# Allegro board CCS.brd
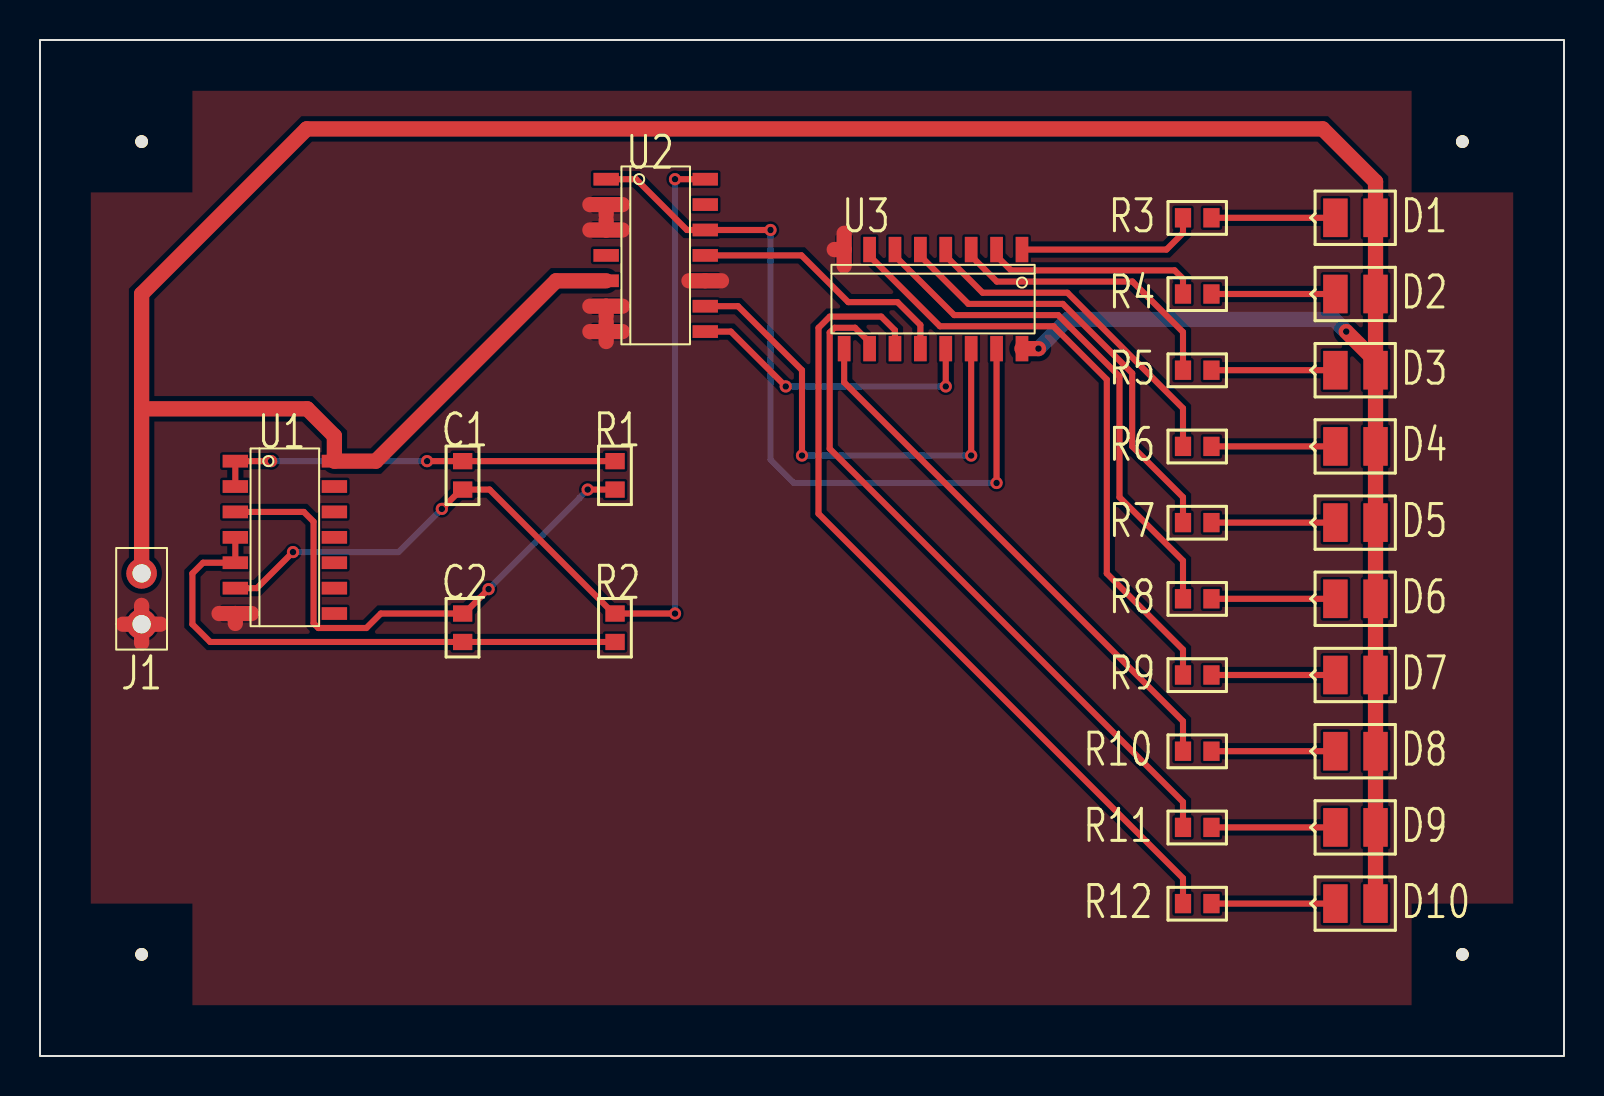
[diagram p0: board, top side]
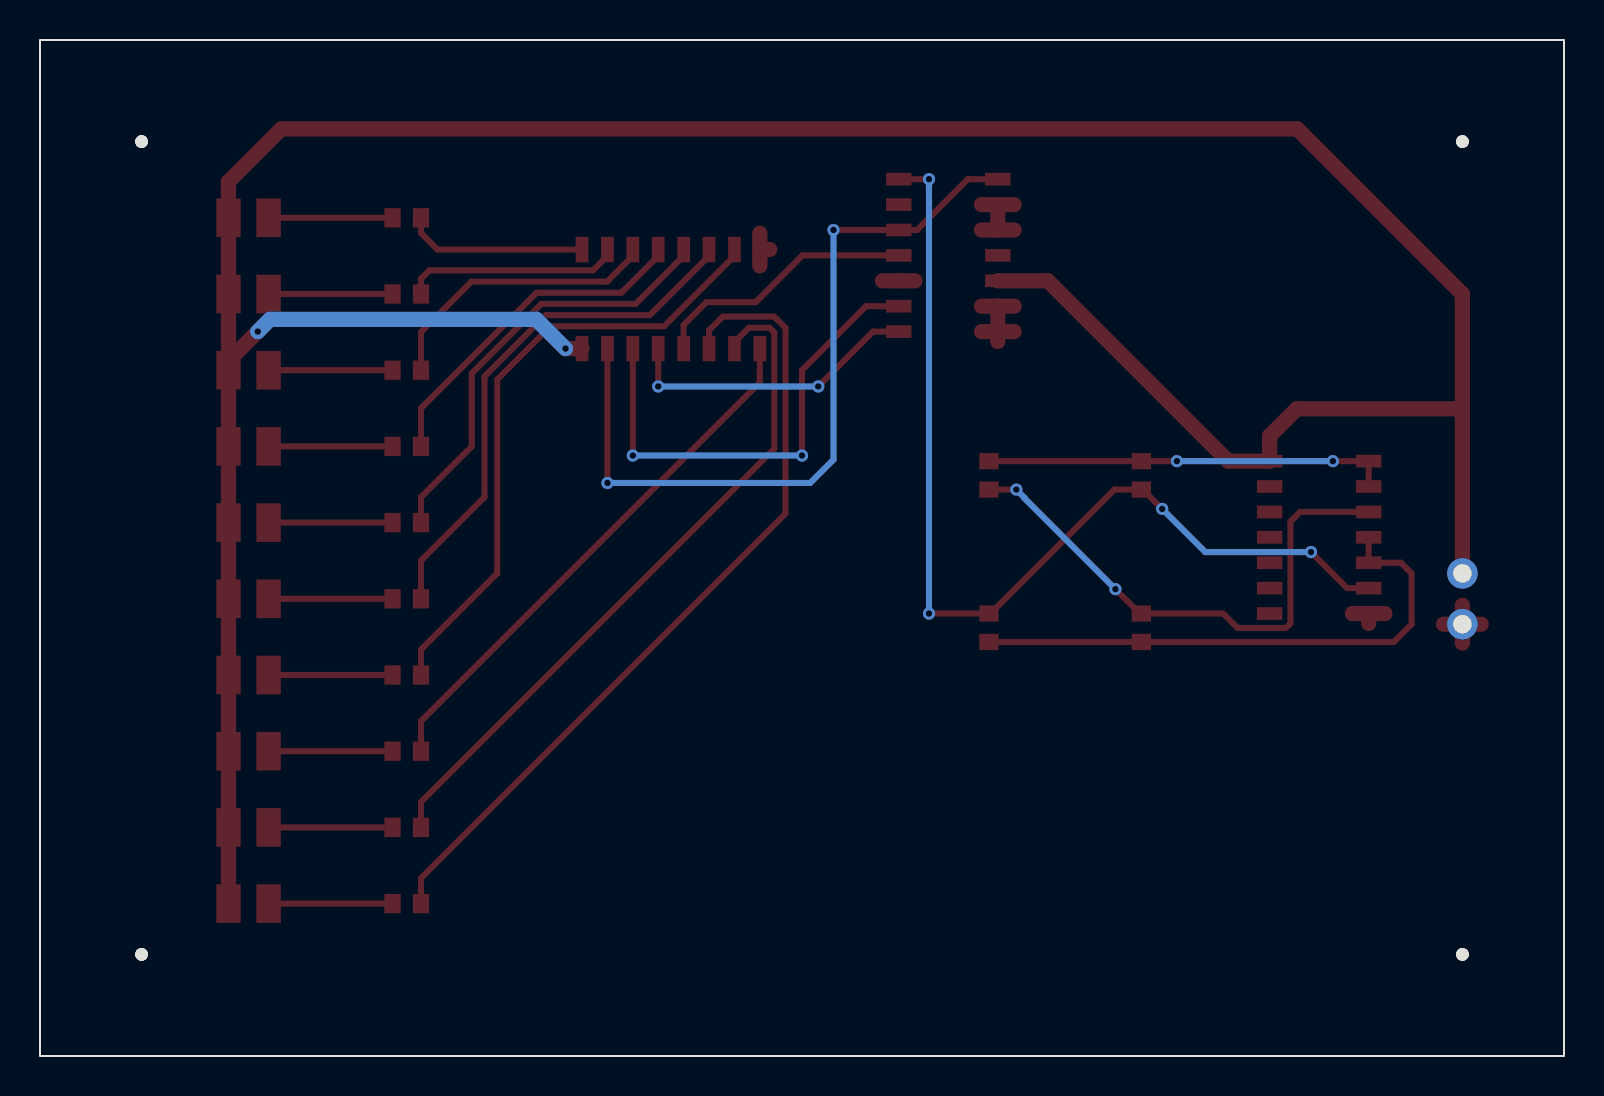
[diagram p1: board, bottom side, seen from below]

Outline 76.2 x 50.8 mm; copper layers: TOP, BOTTOM. Coordinates in mm from the lower left corner of the outline.
Outline path: rectangle 0,0 76.2,50.8

## Design rules (mm)
constraint set DEFAULT: min track width 0.305
nets with their own width: min track width 0.762; nets GND VCC

## Placement (name value [footprint] x y rotation side)
C1  47u  [SMC0603]  21.13 29.74 270 top
C2  47u  [SMC0603]  21.13 22.12 270 top
D1  LED  [SMD080512]  64.77 41.91 0 top
D2  LED  [SMD080512]  64.77 38.1 0 top
D3  LED  [SMD080512]  64.77 34.29 0 top
D4  LED  [SMD080512]  64.77 30.48 0 top
D5  LED  [SMD080512]  64.77 26.67 0 top
D6  LED  [SMD080512]  64.77 22.86 0 top
D7  LED  [SMD080512]  64.77 19.05 0 top
D8  LED  [SMD080512]  64.77 15.24 0 top
D9  LED  [SMD080512]  64.77 11.43 0 top
D10  LED  [SMD080512]  64.77 7.62 0 top
J1  CON2  [JUMPER2]  5.08 24.13 270 top
NOREF  -  [unnamed]  71.12 45.72 0 top
NOREF#2  -  [unnamed]  5.08 5.08 0 top
NOREF#3  -  [unnamed]  5.08 45.72 0 top
NOREF#4  -  [#2]  0 50.8 0 top
NOREF#5  -  [#2]  76.2 0 90 top
NOREF#6  -  [unnamed]  71.12 5.08 0 top
R1  1k  [SMR0603]  28.75 29.74 270 top
R2  1k  [SMR0603]  28.75 22.12 270 top
R3  100  [SMR0603]  57.15 41.91 0 top
R4  100  [SMR0603]  57.15 38.1 0 top
R5  100  [SMR0603]  57.15 34.29 0 top
R6  100  [SMR0603]  57.15 30.48 0 top
R7  100  [SMR0603]  57.15 26.67 0 top
R8  100  [SMR0603]  57.15 22.86 0 top
R9  100  [SMR0603]  57.15 19.05 0 top
R10  100  [SMR0603]  57.15 15.24 0 top
R11  100  [SMR0603]  57.15 11.43 0 top
R12  100  [SMR0603]  57.15 7.62 0 top
U1  7400  [SOIC14]  12.24 25.93 0 top
U2  7490  [SOIC14]  30.78 40.03 0 top
U3  7442  [SOIC16]  44.65 37.85 270 top

## Library data of the parts
C1 C2 = CAP NP
D1-D10 = LED
J1 = CON2: User Part Number: ***
R1-R12 = R
U1 = 7400: Tolerance: ***; User Part Number: ***
U2 = 7490: Tolerance: ***; User Part Number: ***
U3 = 7442: Tolerance: ***; User Part Number: ***

## Footprints (pads in the part's own frame, mm; a bottom-side part is the same pattern mirrored in y, then rotated)
JUMPER2
  round 1.524 hole 0.914: 1(0,0) 2(2.54,0)
SMC0603
  rect 0.813x0.965 smd: 1(0,0) 2(1.422,0)
SMD080512
  rect 1.219x1.93 smd: 1(0,0) 2(2.007,0)
SMR0603
  rect 0.813x0.965 smd: 1(0,0) 2(1.422,0)
SOIC14
  rect 1.27x0.635 smd: 1(-2.477,3.81) 2(-2.477,2.54) 3(-2.477,1.27) 4(-2.477,0) 5(-2.477,-1.27) 6(-2.477,-2.54) 7(-2.477,-3.81) 8(2.477,-3.81) 9(2.477,-2.54) 10(2.477,-1.27) 11(2.477,0) 12(2.477,1.27) 13(2.477,2.54) 14(2.477,3.81)
SOIC16
  rect 1.27x0.635 smd: 1(-2.477,4.445) 2(-2.477,3.175) 3(-2.477,1.905) 4(-2.477,0.635) 5(-2.477,-0.635) 6(-2.477,-1.905) 7(-2.477,-3.175) 8(-2.477,-4.445) 9(2.477,-4.445) 10(2.477,-3.175) 11(2.477,-1.905) 12(2.477,-0.635) 13(2.477,0.635) 14(2.477,1.905) 15(2.477,3.175) 16(2.477,4.445)
unnamed
  round 0.635 hole 3.175 unplated: (0,0)

## Nets
GND: J1.2 U1.7 U2.2 U2.3 U2.6 U2.7(R92) U2.10 U3.8
VCC: D1.2 D2.2 D3.2 D4.2 D5.2 D6.2 D7.2 D8.2 D9.2 D10.2 J1.1 U1.14 U2.5 U3.16
CLK: C1.2 R2.1 U1.6 U2.14
N00847: R3.1 U3.1
N00853: R4.1 U3.2
N00859: R5.1 U3.3
N00865: R6.1 U3.4
N00871: R7.1 U3.5
N00877: R8.1 U3.6
N00883: R9.1 U3.7
N00889: R10.1 U3.9
N00895: R11.1 U3.10
N00901: R12.1 U3.11(Y\9\)
N00905: D1.1(CATHODE) R3.2
N00911: D2.1(CATHODE) R4.2
N00917: D3.1(CATHODE) R5.2
N00923: D4.1(CATHODE) R6.2
N00929: D5.1(CATHODE) R7.2
N00935: D6.1(CATHODE) R8.2
N00941: D7.1(CATHODE) R9.2
N00947: D8.1(CATHODE) R10.2
N00953: D9.1(CATHODE) R11.2
N00959: D10.1(CATHODE) R12.2
N01162: U2.1 U2.12 U3.15
N01168: U2.9 U3.14
N01174: U2.8 U3.13
N01180: U2.11 U3.12
N01706: C2.1 R1.2 U1.3
N01732: C2.2 R2.2 U1.4 U1.5
N01891: C1.1 R1.1 U1.1 U1.2

Pads without a net: U1 8 9 10 11 12 13; U2 4 13

## Via types
v1: diameter 0.61, hole 0.33, TOP to BOTTOM, 16 vias

## Routing (per net, layer and track width the routed paths; a pad name or vN(x,y) marks a point on that pad's centre or on a via; arc(x,y) is an arc through that point)
GND: length 18.6
  TOP w0.762: 8.95,22.12 U1.7 ; U1.7 10.58,22.12 ; U1.7 9.77,21.63 ; 4.14,21.59 J1.2 ; J1.2 5.08,20.65 ; J1.2 6.02,21.59 ; J1.2 5.08,22.53 ; U2.7 29.12,36.22 ; U2.7 28.31,36.72 ; U2.7 28.31,35.72 ; U2.7 27.49,36.22 ; 28.31,36.99 U2.6 ; U2.6 29.12,37.49 ; U2.6 27.49,37.49 ; U3.8 40.21,41.14 ; U3.8 40.21,39.51 ; U3.8 39.71,40.32 ; 28.31,42.07 U2.2 ; U2.2 27.49,42.57 ; U2.2 29.12,42.57 ; U2.3 28.31,41.8 ; U2.3 29.12,41.3 ; U2.3 27.49,41.3 ; 34.07,38.76 U2.10 32.45,38.76
VCC: length 164.2
  TOP w0.762: D10.2 D9.2 D8.2 D7.2 D6.2 D5.2 D4.2 D3.2 66.78,34.76 ; 66.78,34.76 D2.2 D1.2 66.78,43.71 64.14,46.35 13.34,46.35 5.08,38.1 5.08,32.36 ; 66.78,34.76 v1(65.31,36.22) ; U3.16 v1(49.92,35.37) ; U2.5 25.81,38.76 16.79,29.74 U1.14 14.72,31 13.36,32.36 5.08,32.36 ; 5.08,32.36 J1.1
  BOTTOM w0.762: v1(65.31,36.22) 64.7,36.83 51.38,36.83 v1(49.92,35.37)
CLK: length 49.8
  TOP w0.305: U2.14 v1(31.75,43.84) ; v1(20.09,27.36) 21.06,28.32 C1.2 22.48,28.32 28.68,22.12 R2.1 v1(31.75,22.12) ; U1.6 10.85,23.39 v1(12.65,25.2)
  BOTTOM w0.305: v1(31.75,22.12) v1(31.75,43.84) ; v1(12.65,25.2) 17.93,25.2 v1(20.09,27.36)
N00847: length 9.2
  TOP w0.305: R3.1 57.15,41.15 56.32,40.32 U3.1
N00853: length 10.9
  TOP w0.305: R4.1 57.15,38.86 56.73,39.28 48.55,39.28 47.83,40.01 U3.2
N00859: length 14.4
  TOP w0.305: R5.1 57.15,36.2 54.62,38.72 47.84,38.72 46.56,40.01 U3.3
N00865: length 17.2
  TOP w0.305: R6.1 57.15,32.38 51.37,38.16 47.13,38.16 45.29,40.01 U3.4
N00871: length 21.9
  TOP w0.305: U3.5 44.02,40.01 46.42,37.6 51.14,37.6 54.61,34.13 54.61,30.48 57.15,27.94 R7.1
N00877: length 26.5
  TOP w0.305: R8.1 57.15,24.77 53.98,27.94 53.98,33.98 50.91,37.05 45.71,37.05 42.75,40.01 U3.6
N00883: length 31.1
  TOP w0.305: R9.1 57.15,20.32 53.34,24.13 53.34,33.82 50.68,36.49 45,36.49 41.48,40.01 U3.7
N00889: length 27.1
  TOP w0.305: U3.9 40.21,33.68 57.15,16.74 R10.1
N00895: length 34.8
  TOP w0.305: U3.10 41.48,35.69 40.75,36.41 39.72,36.41 39.48,36.17 39.48,30.37 57.15,12.7 R11.1
N00901: length 41.6
  TOP w0.305: U3.11 42.75,36.28 42.06,36.97 39.49,36.97 38.93,36.4 38.93,27.11 57.15,8.89 R12.1
N00905: length 6.2
  TOP w0.305: R3.2 D1.1
N00911: length 6.2
  TOP w0.305: R4.2 D2.1
N00917: length 6.2
  TOP w0.305: R5.2 D3.1
N00923: length 6.2
  TOP w0.305: D4.1 R6.2
N00929: length 6.2
  TOP w0.305: R7.2 D5.1
N00935: length 6.2
  TOP w0.305: R8.2 D6.1
N00941: length 6.2
  TOP w0.305: D7.1 R9.2
N00947: length 6.2
  TOP w0.305: R10.2 D8.1
N00953: length 6.2
  TOP w0.305: D9.1 R11.2
N00959: length 6.2
  TOP w0.305: D10.1 R12.2
N01162: length 39.3
  TOP w0.305: U2.1 29.81,43.84 32.35,41.3 U2.12 v1(36.53,41.3) ; U3.15 v1(47.83,28.65)
  BOTTOM w0.305: v1(47.83,28.65) 37.69,28.65 36.53,29.82 v1(36.53,41.3)
N01168: length 24.2
  TOP w0.305: U3.14 v1(46.56,30.02) ; v1(38.1,30.02) 38.1,34.29 34.9,37.49 U2.9
  BOTTOM w0.305: v1(38.1,30.02) v1(46.56,30.02)
N01174: length 15.1
  TOP w0.305: U2.8 34.54,36.22 v1(37.29,33.48) ; U3.13 v1(45.29,33.48)
  BOTTOM w0.305: v1(37.29,33.48) v1(45.29,33.48)
N01180: length 13.4
  TOP w0.305: U2.11 38.07,40.03 40.41,37.69 42.88,37.69 44.02,36.55 U3.12
N01706: length 27.2
  TOP w0.305: v1(22.43,23.34) 21.21,22.12 C2.1 17.04,22.12 16.32,21.4 13.92,21.4 13.68,21.64 13.68,26.72 13.19,27.2 U1.3 ; R1.2 v1(27.38,28.32)
  BOTTOM w0.305: v1(22.43,23.34) 26.97,27.88 26.97,27.91 v1(27.38,28.32)
N01732: length 27.7
  TOP w0.305: R2.2 C2.2 8.51,20.7 7.62,21.59 7.62,24.13 8.15,24.66 U1.5 U1.4
N01891: length 20.3
  TOP w0.305: U1.2 U1.1 v1(11.56,29.74) ; v1(19.35,29.74) C1.1 R1.1
  BOTTOM w0.305: v1(11.56,29.74) v1(19.35,29.74)

## Copper pours and planes (outline as drawn; the poured copper is in the pictures)
GND on TOP: 2.54,2.54 2.54,48.26 73.66,48.26 73.66,2.54

## Text on the board
DIMENSION: FIGURE | FINISHED_SIZE | 13.0 | 36.0 | 125.0 | DRILL CHART: TOP to BOTTOM | ALL UNITS ARE IN MILS | PLATED | NON-PLATED | QTY | 16 | 2 | 4
